# Altium PCB controller_3D.PcbDoc
Units mil, origin at the board's own origin, x right, y up, seen from the top; angles counter-clockwise.
Board outline 2978 x 3898 mil, 2 copper layers (Top Layer, Bottom Layer); 13 components, 47 nets, 125 pads, 0 vias.
Unrouted connection lines stored in the file: 63.
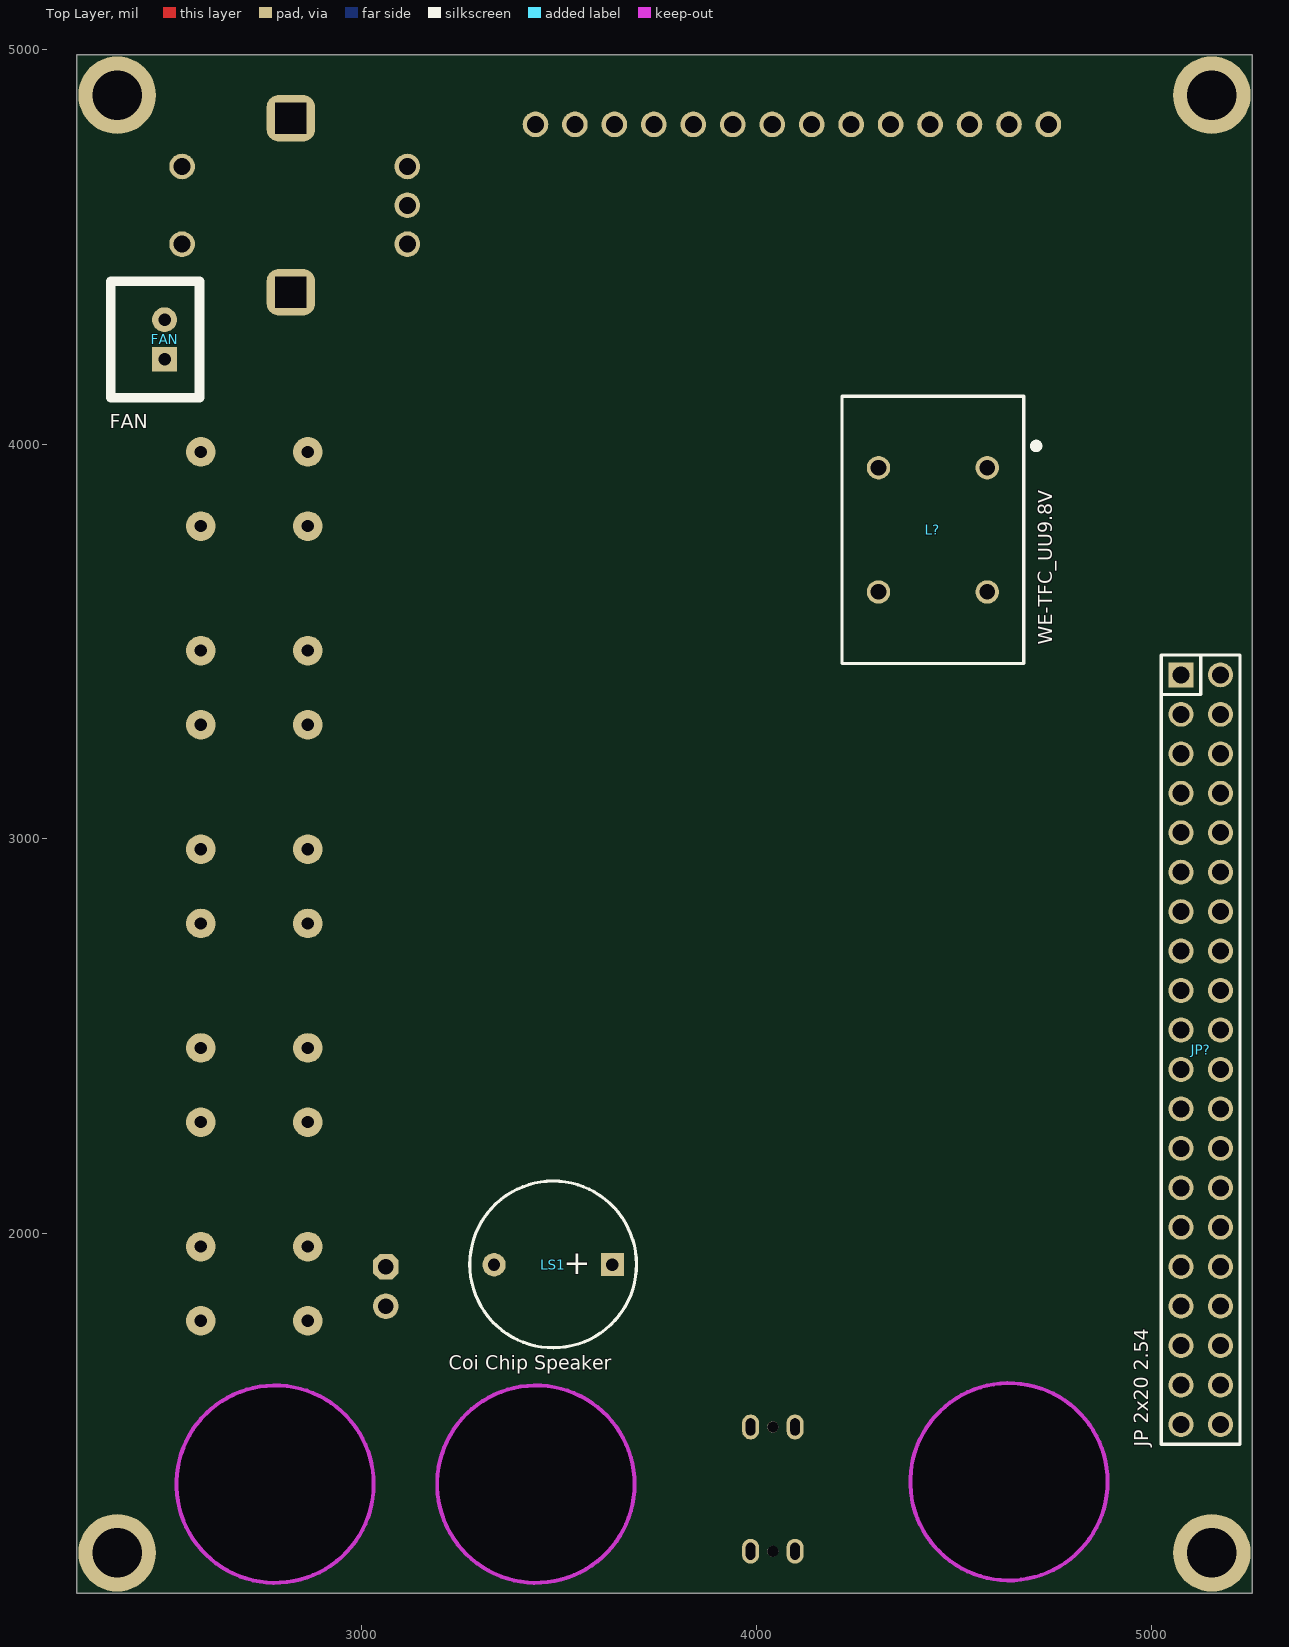
[diagram p0: Top Layer view]
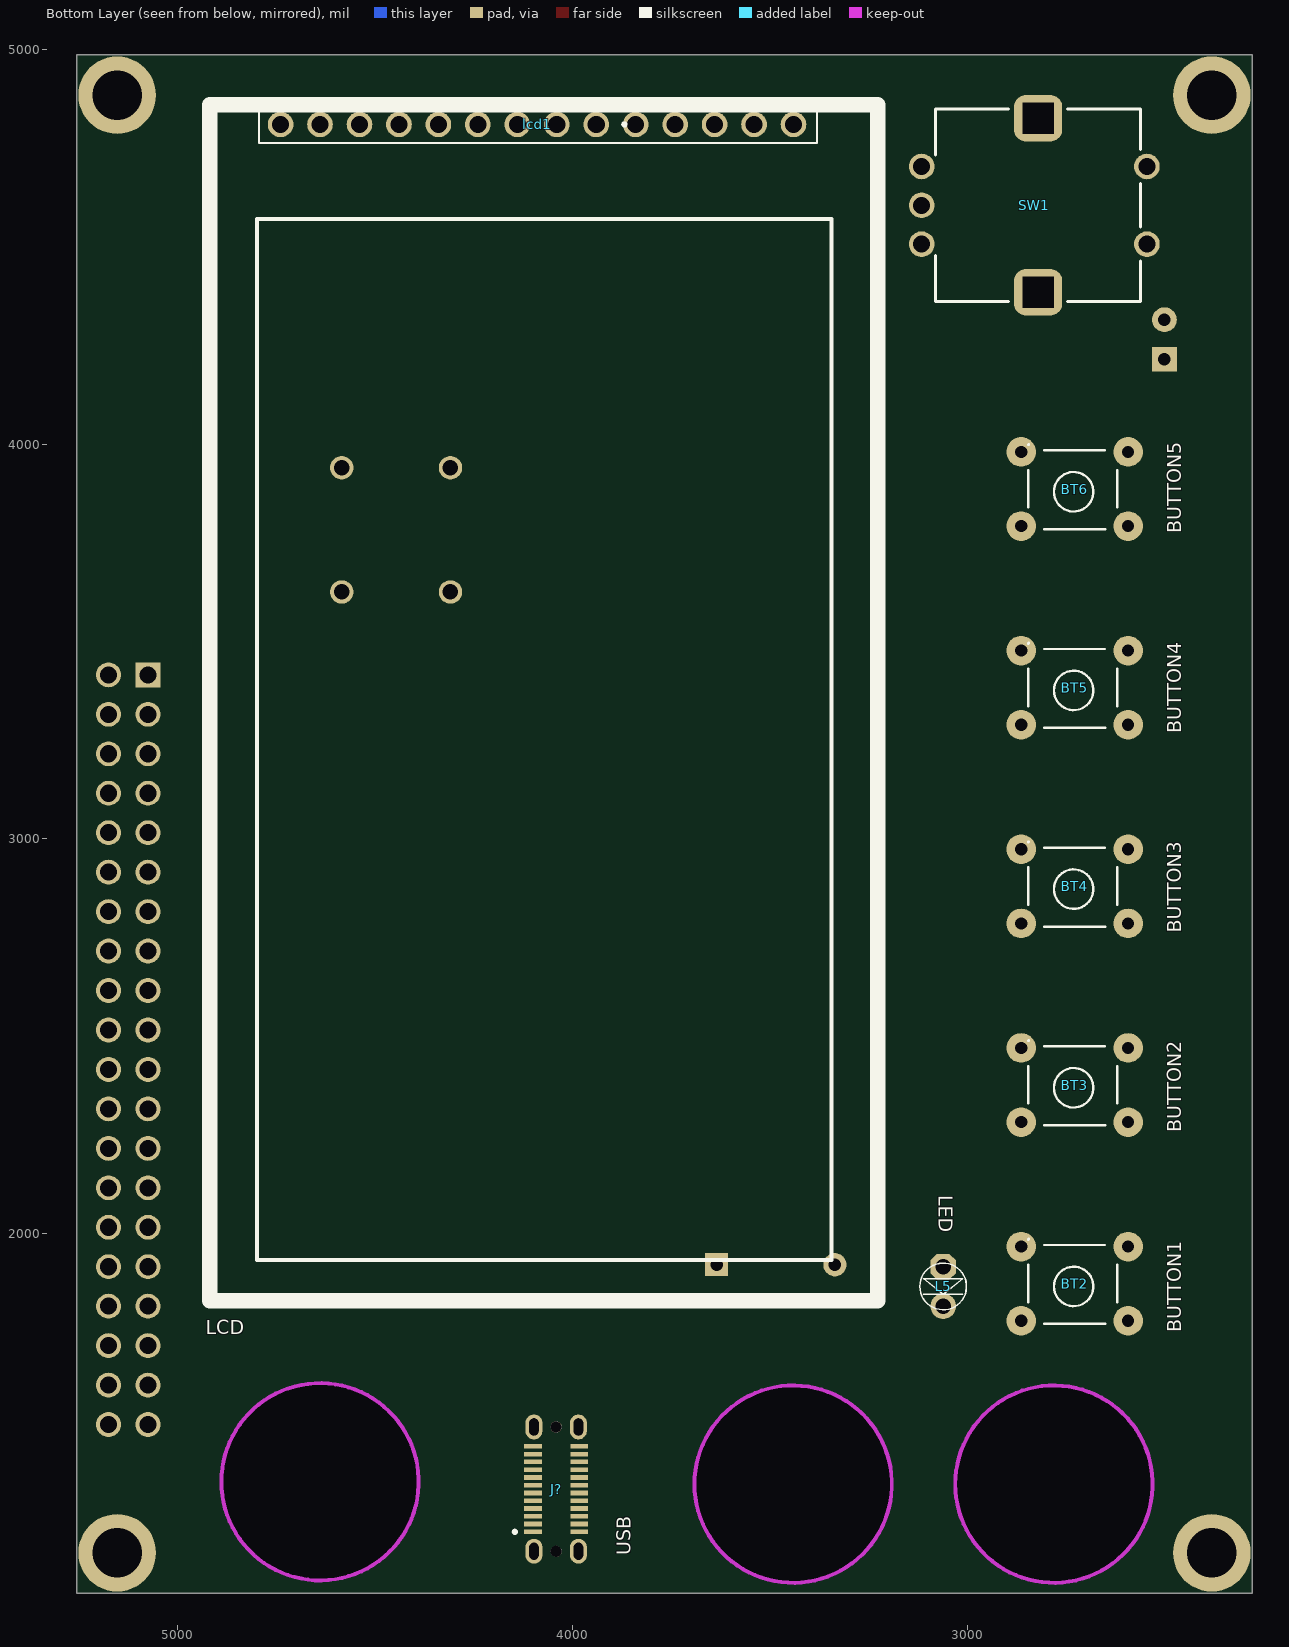
[diagram p1: Bottom Layer view, seen from below]

## Layer stack, top to bottom
Top Solder: solder mask 0.4, Solder Resist, Dk 3.5
Top Layer: signal copper 1.4
Dielectric 1: dielectric 12.6, FR-4, Dk 4.8
Bottom Layer: signal copper 1.4
Bottom Solder: solder mask 0.4, Solder Resist, Dk 3.5

## Board outline
2278,1088 2278,4986 5256,4986 5256,1088
cut-out: 4389.93,1370 ccw(c4640,1370) 4640,1119.93 ccw(c4640,1370) 4890.07,1370 ccw(c4640,1370) 4640,1620.07 ccw(c4640,1370)
cut-out: 3190.93,1364 ccw(c3441,1364) 3441,1113.93 ccw(c3441,1364) 3691.07,1364 ccw(c3441,1364) 3441,1614.07 ccw(c3441,1364)
cut-out: 2529.93,1364 ccw(c2780,1364) 2780,1113.93 ccw(c2780,1364) 3030.07,1364 ccw(c2780,1364) 2780,1614.07 ccw(c2780,1364)

## Design rules (kind name [scope] priority, off if disabled: settings)
Clearance [All] p1: gap=15 ignorepadtopadclearanceinfootprint=FALSE
PolygonConnect [All] p1: connectstyle=Direct reliefconductorwidth=10 reliefentries=4 polygonreliefangle="90 Angle" airgapwidth=10
RoutingVias [All] p1: holewidth=15.75 width=31.5 viastyle="Through Hole" minholewidth=15.75 minwidth=31.5 maxholewidth=15.75 maxwidth=31.5
SolderMaskExpansion [All] p1: expansion=4 istentingtop=FALSE
Width [All] p1: maxlimit=35 minlimit=8 preferedwidth=20
30 further rules are at their usual default settings.

## Components (designator, comment, footprint, x,y, rotation, side; value= is the part's Value field where it differs from the comment)
BT2 "BUTTON1" "Nut Nhan 4 Chan Cam 6x6" 2605,1770 r0 bottom
BT3 "BUTTON2" "Nut Nhan 4 Chan Cam 6x6" 2605,2273.5 r0 bottom
BT4 "BUTTON3" "Nut Nhan 4 Chan Cam 6x6" 2605,2777 r0 bottom
BT5 "BUTTON4" "Nut Nhan 4 Chan Cam 6x6" 2605,3280.5 r0 bottom
BT6 "BUTTON5" "Nut Nhan 4 Chan Cam 6x6" 2605,3784 r0 bottom
FAN "FAN" XH2.54M-2 2500,4215 r90 top (schematic designator H1)
J? "USB" GCT_USB4160-03-0230-C_REVA2 4041.54,1351.42 r90 bottom
JP? "JP 2x20 2.54" "JP 2x20 DT" 5126,2465 r270 top locked
L5 "LED" LED-3MM-BLUE 3060.67,1860 r270 bottom
L? "WE-TFC_UU9.8V" WE-TFC_UU9.8V 4447.2,3782.52 r270 top
lcd1 "LCD" AMPHENOL_68001-103HLF 4040,4810 r0 bottom locked
LS1 "Coi Chip Speaker" "Coi Chip Speacker" 3635,1920.5 r180 top
SW1 "482024764004" 482024764004 2820,4605 r0 bottom

## Footprints (in the part's own frame and the unit in brackets; to place one, negate y for a bottom-side part, rotate by r counter-clockwise, add the part's x,y. Pads: shape width x height; smd on the part's side, far side on the other; paste and mask are expansions set on the pad)
482024764004 [mm]
  round 1.65 hole 1.1: 1(-7,-2.5) 2(-7,2.5) A(7.5,-2.5) B(7.5,2.5) C(7.5,0)
  rrect50% 3.1x3 hole 2 square: S1(0,5.6) S2(0,-5.6)
  silkscreen extent -6.6,-6.2 6.6,6.2, body extent -7.32,-6.81 7.8,6.81, height 20.1
AMPHENOL_68001-103HLF [mm]
  round 1.65 hole 1.1: 1(-15.24,0) 2(-12.7,0) 3(-10.16,0) 4(-7.62,0) 5(-5.08,0) 6(-2.54,0) 7(0,0) 8(2.54,0) 9(5.08,0) 10(7.62,0) 11(10.16,0) 12(12.7,0) 13(15.24,0) 14(17.78,0)
  silkscreen extent -20.65,-1.27 22.35,75.73, body extent -16.76,-1.14 -9.14,1.27, height 8.38
"Coi Chip Speacker" [mm]
  rect 1.5x1.5 hole 0.8: 1(0,0)
  round 1.5 hole 0.8: 2(7.62,0.013)
  silkscreen extent -1.55,-5.38 9.18,5.36, body extent -2.22,-6 13.24,6, height 4.5
GCT_USB4160-03-0230-C_REVA2 [mm]
  rect 0.3x1.15 smd: A1(-2.75,1.485) A2(-2.25,1.485) A3(-1.75,1.485) A4(-1.25,1.485) A5(-0.75,1.485) A6(-0.25,1.485) A7(0.25,1.485) A8(0.75,1.485) A9(1.25,1.485) A10(1.75,1.485) A11(2.25,1.485) A12(2.75,1.485) B1(2.75,-1.485) B2(2.25,-1.485) B3(1.75,-1.485) B4(1.25,-1.485) B5(0.75,-1.485) B6(0.25,-1.485) B7(-0.25,-1.485) B8(-0.75,-1.485) B9(-1.25,-1.485) B10(-1.75,-1.485) B11(-2.25,-1.485) B12(-2.75,-1.485)
  oval 1.6x1.1 hole 0.6 slot 1.1 at 0 deg: S1(-4,1.43) S2(4,1.43) S3(-4,-1.43) S4(4,-1.43)
  round 0.71 hole 0.71 unplated: ""(-4,0) ""(4,0)
  silkscreen extent -2.85,2.56 -2.65,2.76
"JP 2x20 DT" [mm] "40 pins, dual pin, straight, gold plating"
  rect 1.6x1.6 hole 1.1: 1(-24.13,-1.27)
  round 1.6 hole 1.1: 2(-21.59,-1.27) 3(-19.05,-1.27) 4(-16.51,-1.27) 5(-13.97,-1.27) 6(-11.43,-1.27) 7(-8.89,-1.27) 8(-6.35,-1.27) 9(-3.81,-1.27) 10(-1.27,-1.27) 11(1.27,-1.27) 12(3.81,-1.27) 13(6.35,-1.27) 14(8.89,-1.27) 15(11.43,-1.27) 16(13.97,-1.27) 17(16.51,-1.27) 18(19.05,-1.27) 19(21.59,-1.27) 20(24.13,-1.27) 21(24.13,1.27) 22(21.59,1.27) 23(19.05,1.27) 24(16.51,1.27) 25(13.97,1.27) 26(11.43,1.27) 27(8.89,1.27) 28(6.35,1.27) 29(3.81,1.27) 30(1.27,1.27) 31(-1.27,1.27) 32(-3.81,1.27) 33(-6.35,1.27) 34(-8.89,1.27) 35(-11.43,1.27) 36(-13.97,1.27) 37(-16.51,1.27) 38(-19.05,1.27) 39(-21.59,1.27) 40(-24.13,1.27)
  silkscreen extent -25.4,-2.54 25.4,2.54, body extent -25.4,-2.54 25.4,2.54, height 8.55
LED-3MM-BLUE [mil]
  oct 65x65 hole 40: 1(-55,0)
  round 65 hole 40: 2(45,0)
  silkscreen extent -64,-59 54,59, body extent -72,-65 54,65, height 184
"Nut Nhan 4 Chan Cam 6x6" [mil] "SW button 4pin, 250 x250 mil"
  round 75 hole 31: 1(-13,-8) 1(258,-8) 2(-13,-196) 2(258,-196)
  silkscreen extent 15,-215 240,0, body extent -31,-225 281,19, height 276
WE-TFC_UU9.8V [mm]
  round 1.508 hole 1: 1(-4,3.5) 2(4,3.5) 3(4,-3.5) 4(-4,-3.5)
  silkscreen extent -8.6,-5.85 8.6,6.85, body extent -5.3,-9.05 5.3,9.7, height 7.85
XH2.54M-2 [mm]
  rect 1.6x1.6 hole 0.8: 1(0,0)
  round 1.6 hole 0.8: 2(2.54,0)
  silkscreen extent -2.48,-2.26 5.02,3.46, body extent -2.48,-2.26 5.02,3.48, height 6.91

## Part data
BT2 BT3 BT4 BT5 BT6: library part "Nut Nhan 4 Chan Cam 6x6", "Nut Nhan 4 Chan 6x6mm", Ma_Hang=MH004584, Ten="Nút Nhấn 4 Chân 6x6x5MM DIP"
FAN: library part "Header 2P 2.54 Duc Thang", "Cắm", Chung_Loai=Cắm, Don_Vi=Con, Ma_Hang=MH001283, Ten_Linh_Kien="Header 2P XH2.54-2P Đực Thẳng"
J?: library part USB4160-03-0230-C_REVA2, Package=None, Availability=Unavailable, MP=USB4160-03-0230-C_REVA2, Price=None
JP?: library part "JP 2x20 2.54 Duc Thang", "Cắm", Chung_Loai=Cắm, Don_Vi=Con, Ma_Hang=MH002686, Ten_Linh_Kien="Jump Đôi Đực 2.54MM 2x40P Thẳng 11MM"
L5: library part "LED 3mm Xanh Duong", "Cắm", Chung_Loai=Cắm, Don_Vi=Con, Ma_Hang=MH009003, Ten_Linh_Kien="LED 3MM Xanh Dương SS (1000c)"
L?: "Size Typ UU; L = 25 mH; IR = 0.25 A; RDC = 3.6 â„", Package="Vertical-4 Wurth Electronics", Check_prices=https://www.snapeda.com/parts/744862250/Wurth+Electronics/view-part/?ref=eda, MF="Wurth Electronics", MP=744862250, SnapEDA_Link=https://www.snapeda.com/parts/744862250/Wurth+Electronics/view-part/?ref=snap
lcd1: library part 68001-103HLF, "Conn Rect UnshroudedHdr 3Cnts ThruHole BergStik 2.54mmPin-Spng Vert 1-Row", Package=None, Check_prices=https://www.snapeda.com/parts/68001-103HLF/Amphenol/view-part/?ref=eda, MF=Amphenol, MP=68001-103HLF, SnapEDA_Link=https://www.snapeda.com/parts/68001-103HLF/Amphenol/view-part/?ref=snap
LS1: "Còi chip"
SW1: "WS-ENTV Mechanical Incremental Encoder Switch, Plastic Shaft without bushing, 24Pulse/360°, 24positi", Insulation Resistance=100MΩ, Manufacturer="Wurth Elektronik", Operating Temperature Max=85°C, Operating Temperature Min=-40°C, Rated Current=10mA, Category="Encoder Switches", ComponentLink1Description="Website Link", ComponentLink1URL=https://www.we-online.com/redexpert/article/482024764004?ad, ComponentLink2Description="Datasheet Link", ComponentLink2URL=https://www.we-online.com/redexpert/spec/482024764004?ad, Detent=24positions, Electrical Life Encoder=30000Cycles, Electrical Life Switch=20000Cycles, Height=20mm, Length=13.2mm, Manufacturer Part Number=482024764004, Match Code=WS-ENTV, Mount="Through Hole", Operation Force=300g, Packaging=Tray, Resolution=24Pulse/360°, Width=12.4mm

## Free pads (board coordinates)
  round 196.85 hole 125.98: 12(2380,1190) 12(2380,4884) 12(5154,1190) 12(5154,4884)

## Nets (pads, with @x,y where several pads share a name; then routed paths per layer and width w, separated by ;. In a path a pad name is that pad's centre, name@x,y a point inside that pad or via, vN(x,y) a via of type N, cw(c..) or ccw(c..) an arc to the next point about the centre after c; other vN are vias at no path point)
+5: JP?.24 JP?.38 LS1.1
+12: FAN.1 JP?.23 JP?.39
BT1: BT2.2 JP?.28
BT2: BT3.2 JP?.13
BT3: BT4.2 JP?.29
BT4: BT5.2 JP?.12
BT5: BT6.2 JP?.30
buzzer: JP?.27
CS: JP?.34 lcd1.3
data+: J?.A6 J?.B6
data-: J?.A7 J?.B7
DC: JP?.8 lcd1.5
EN: 
enc_a: JP?.10 SW1.B
enc_b: JP?.31 SW1.A
enc_c: JP?.11 SW1.1
FB: 
GND: BT2.1 BT3.1 BT4.1 BT5.1 BT6.1 FAN.2 J?.A1 J?.A12 J?.B1 J?.B12 J?.S1 J?.S2 J?.S3 J?.S4 JP?.2 JP?.3 JP?.4 JP?.16 JP?.17 L5.2 L?.3 lcd1.2 SW1.2 SW1.C
led: JP?.14
MISO: JP?.9 lcd1.9 lcd1.13
MOSI: JP?.33 lcd1.6 lcd1.12
NetC11_1: 
NetC27_1: 
NetC31_1: 
NetC32_1: 
NetD7_1: 
NetD11_1: LS1.2
NetJ?_A4: J?.A4 J?.A9
NetJ?_A5: J?.A5
NetJ?_B4: J?.B4 J?.B9
NetJ?_B5: J?.B5
NetL5_1: L5.1
NetQ5_1: 
NetR1_2: 
NetR3_1: 
NetR11_1: 
PGND: JP?.40 L?.2
POWER: JP?.1 L?.1
RESET: JP?.7 lcd1.4
SCK: JP?.32 lcd1.7 lcd1.10
SW: 
T_CS: JP?.5 lcd1.11
T_IRQ: JP?.36 lcd1.14
USB_N: JP?.35
USB_P: JP?.6
V_IN: L?.4
VCC: lcd1.1 lcd1.8
pads on no net: J?. J?.A2 J?.A3 J?.A8 J?.A10 J?.A11 J?.B2 J?.B3 J?.B8 J?.B10 J?.B11 JP?.15 JP?.18 JP?.19 JP?.20 JP?.21 JP?.22 JP?.25 JP?.26 JP?.37 SW1.S1 SW1.S2

## Keep-outs
Keep-Out Layer:
  circle w10: c4640,1370 r250.07
  circle w10: c3441,1364 r250.07
  circle w10: c2780,1364 r250.07

## Text inside footprints (layer, text, board x,y; h text height)
LS1: Top Overlay "+" at 3579.5,1948.5 h60 r180